# EAGLE board badge_spacehuhn (EAGLE 7.6.0)
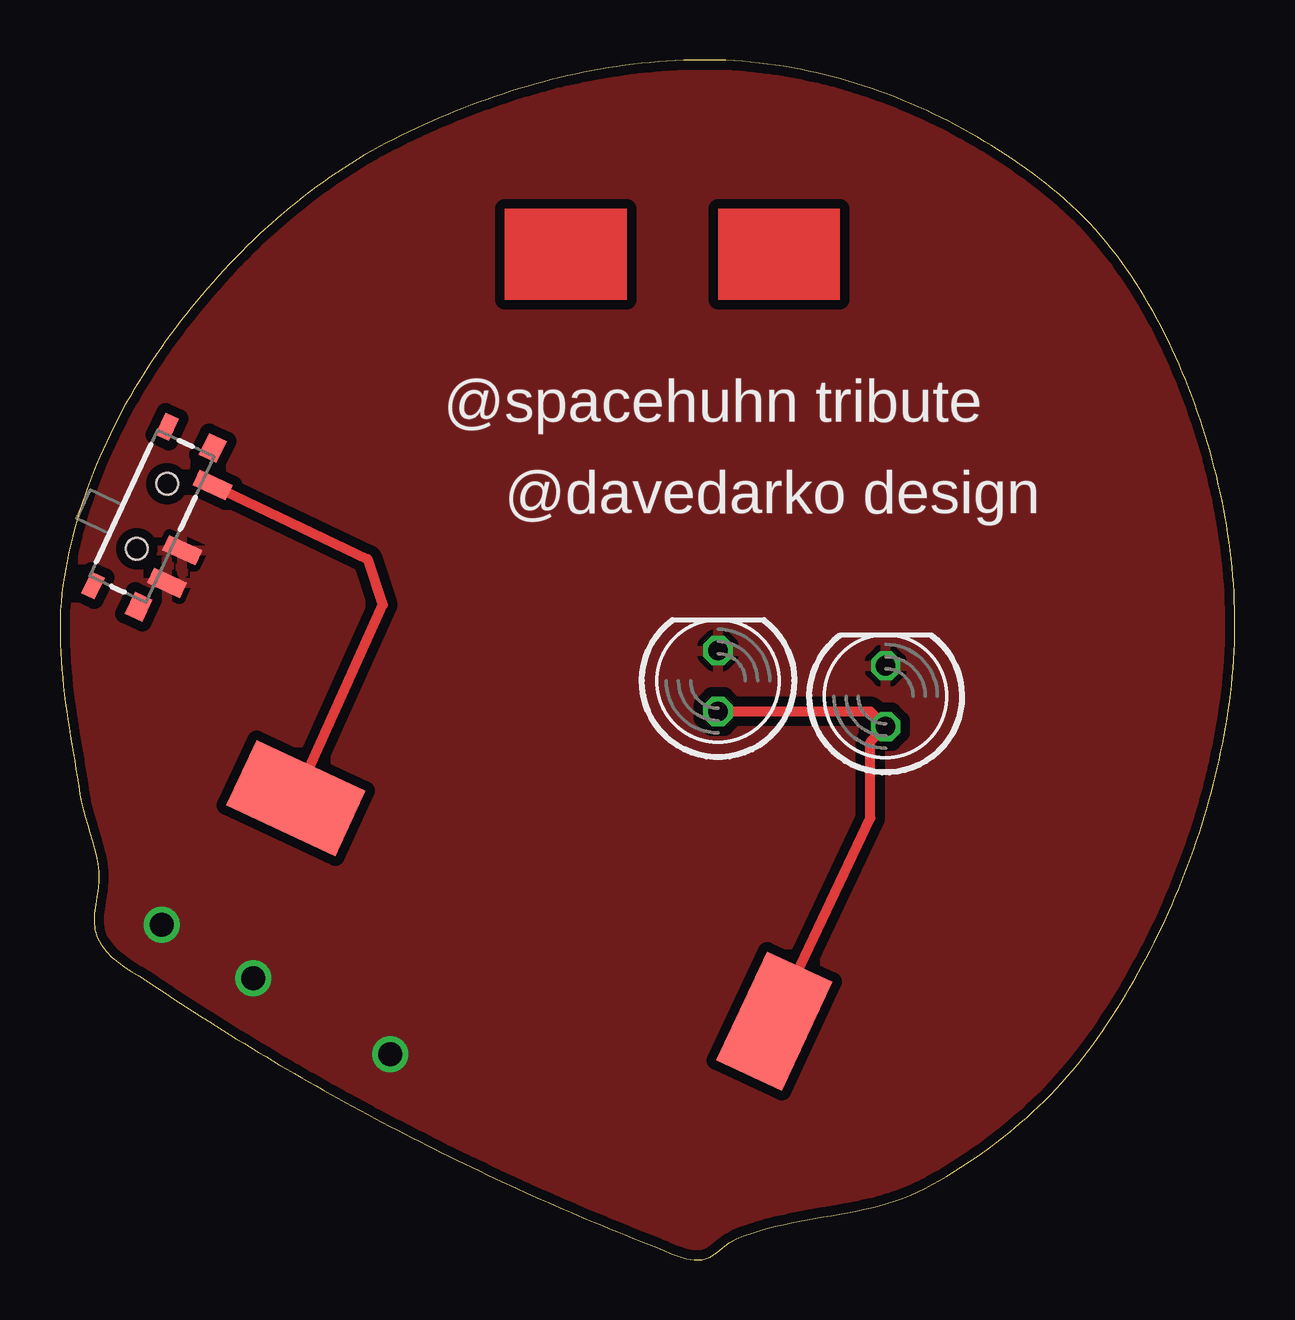
[diagram p0: board, top side]
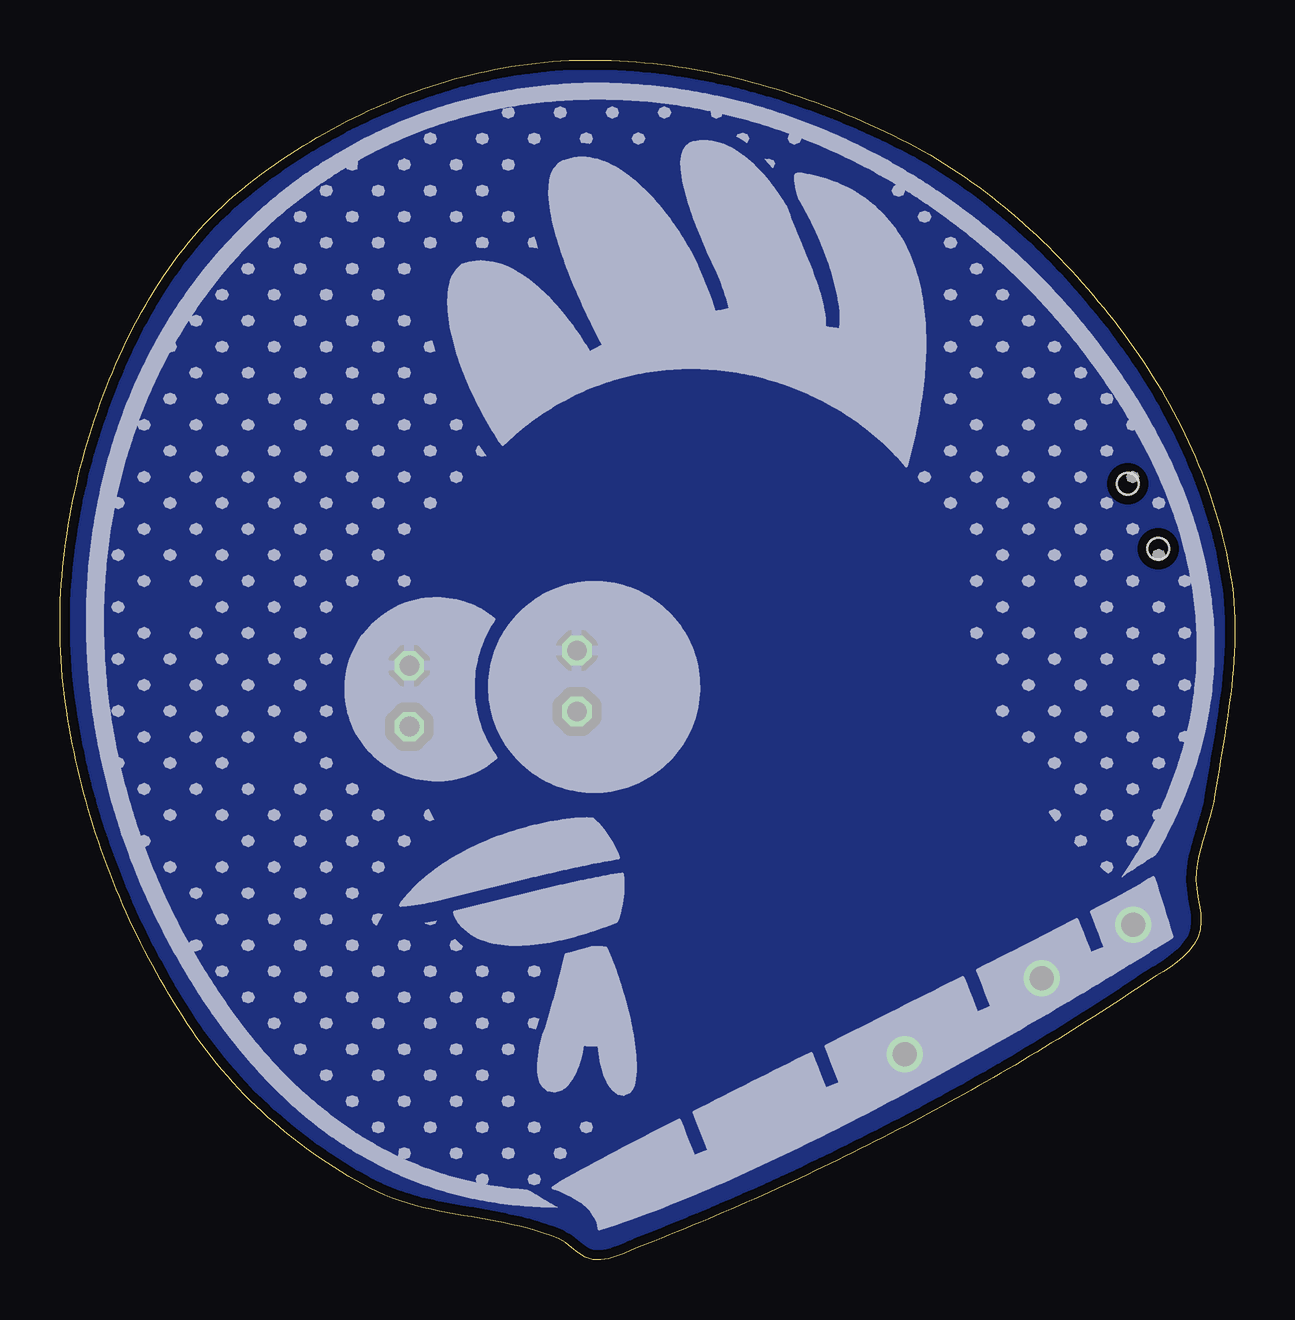
[diagram p1: board, bottom side, seen from below]

Size 48.96 x 50 mm. Coordinates in mm from the lower left corner, seen from the top.
Outline: 28.78,49.9 28.43,49.93 28.09,49.96 27.74,49.98 27.39,49.99 27.04,49.99 26.69,50 26.34,49.99 25.99,49.98 25.64,49.97 25.29,49.95 24.94,49.92 24.59,49.89 24.24,49.86 23.89,49.82 23.55,49.77 23.2,49.72 22.86,49.67 22.51,49.61 22.17,49.54 21.82,49.48 21.48,49.41 21.14,49.33 20.8,49.25 20.46,49.16 20.12,49.08 19.78,48.98 19.45,48.89 19.11,48.79 18.78,48.68 18.44,48.58 18.11,48.46 17.78,48.35 17.45,48.23 17.13,48.11 16.8,47.98 16.47,47.85 16.15,47.72 15.83,47.58 15.51,47.44 15.19,47.3 14.87,47.15 14.55,47.01 14.24,46.85 13.93,46.7 13.61,46.54 13.31,46.38 13,46.21 12.7,46.04 12.41,45.86 12.11,45.68 11.82,45.49 11.53,45.3 11.24,45.11 10.96,44.91 10.68,44.71 10.4,44.5 10.13,44.29 9.86,44.07 9.59,43.86 9.32,43.63 9.06,43.41 8.8,43.18 8.54,42.95 8.29,42.71 8.04,42.47 7.79,42.23 7.54,41.99 7.3,41.74 7.06,41.49 6.83,41.24 6.59,40.98 6.36,40.72 6.13,40.46 5.91,40.2 5.69,39.93 5.47,39.66 5.25,39.39 5.04,39.12 4.83,38.85 4.62,38.57 4.42,38.29 4.21,38.01 4.01,37.72 3.82,37.43 3.63,37.14 3.44,36.85 3.26,36.55 3.08,36.25 2.9,35.95 2.73,35.65 2.56,35.34 2.4,35.03 2.24,34.72 2.09,34.41 1.94,34.09 1.79,33.78 1.65,33.46 1.52,33.13 1.39,32.81 1.26,32.49 1.14,32.16 1.03,31.83 0.92,31.5 0.81,31.17 0.71,30.83 0.62,30.5 0.53,30.16 0.45,29.82 0.37,29.48 0.3,29.14 0.23,28.8 0.17,28.45 0.12,28.11 0.08,27.76 0.04,27.41 0.02,27.06 0.01,26.71 0,26.36 0,26.01 0.01,25.66 0.03,25.31 0.05,24.96 0.07,24.61 0.11,24.26 0.14,23.91 0.18,23.56 0.23,23.22 0.28,22.87 0.33,22.52 0.38,22.18 0.44,21.83 0.49,21.48 0.55,21.14 0.61,20.79 0.66,20.45 0.72,20.1 0.78,19.75 0.83,19.41 0.89,19.08 0.97,18.76 1.05,18.43 1.15,18.11 1.24,17.79 1.34,17.47 1.42,17.15 1.5,16.83 1.57,16.5 1.61,16.17 1.62,15.82 1.59,15.48 1.54,15.14 1.48,14.79 1.44,14.45 1.42,14.1 1.45,13.76 1.55,13.43 1.72,13.13 1.92,12.86 2.17,12.62 2.43,12.4 2.7,12.2 2.99,12.01 3.28,11.83 3.57,11.65 3.85,11.47 4.14,11.27 4.43,11.08 4.72,10.89 5.01,10.7 5.31,10.5 5.6,10.32 5.89,10.13 6.19,9.94 6.48,9.75 6.78,9.57 7.07,9.38 7.37,9.2 7.67,9.02 7.97,8.83 8.27,8.65 8.57,8.47 8.86,8.3 9.16,8.12 9.47,7.94 9.77,7.77 10.07,7.59 10.37,7.42 10.68,7.25 10.98,7.07 11.28,6.9 11.59,6.73 11.9,6.57 12.2,6.4 12.51,6.23 12.82,6.07 13.12,5.9 13.43,5.74 13.74,5.58 14.05,5.41 14.36,5.25 14.67,5.09 14.98,4.94 15.29,4.78 15.6,4.62 15.92,4.47 16.23,4.31 16.54,4.16 16.86,4.01 17.17,3.85 17.49,3.7 17.8,3.55 18.12,3.41 18.43,3.26 18.75,3.11 19.07,2.97 19.39,2.82 19.7,2.68 20.02,2.54 20.34,2.4 20.66,2.25 20.98,2.12 21.3,1.98 21.62,1.84 21.94,1.7 22.27,1.57 22.59,1.43 22.91,1.3 23.23,1.17 23.56,1.04 23.88,0.91 24.21,0.78 24.53,0.65 24.86,0.52 25.16,0.4 25.47,0.27 25.78,0.15 26.1,0.05 26.43,0 26.76,0.01 27.08,0.11 27.36,0.29 27.63,0.5 27.89,0.71 28.18,0.87 28.5,1 28.82,1.11 29.14,1.22 29.47,1.31 29.8,1.4 30.13,1.47 30.47,1.54 30.8,1.61 31.13,1.67 31.47,1.73 31.81,1.79 32.14,1.85 32.48,1.91 32.81,1.97 33.15,2.03 33.48,2.1 33.81,2.18 34.14,2.26 34.47,2.35 34.8,2.45 35.12,2.57 35.43,2.69 35.75,2.83 36.05,2.99 36.35,3.15 36.65,3.32 36.95,3.49 37.24,3.67 37.54,3.85 37.82,4.04 38.11,4.23 38.39,4.43 38.67,4.63 38.95,4.84 39.22,5.05 39.49,5.26 39.76,5.48 40.02,5.7 40.28,5.93 40.53,6.16 40.78,6.4 41.03,6.64 41.27,6.88 41.51,7.13 41.75,7.38 41.98,7.64 42.2,7.9 42.42,8.17 42.64,8.44 42.85,8.71 43.05,8.99 43.25,9.27 43.45,9.56 43.65,9.85 43.84,10.14 44.03,10.44 44.22,10.74 44.4,11.04 44.58,11.34 44.76,11.65 44.93,11.96 45.1,12.27 45.26,12.58 45.43,12.89 45.59,13.2 45.74,13.52 45.9,13.84 46.05,14.16 46.19,14.48 46.33,14.8 46.47,15.12 46.61,15.45 46.74,15.78 46.87,16.1 47,16.43 47.12,16.76 47.24,17.1 47.35,17.43 47.46,17.76 47.57,18.1 47.67,18.44 47.77,18.77 47.87,19.11 47.96,19.45 48.05,19.79 48.14,20.14 48.22,20.48 48.3,20.82 48.37,21.17 48.44,21.51 48.51,21.86 48.57,22.21 48.63,22.55 48.68,22.9 48.73,23.25 48.78,23.6 48.82,23.95 48.85,24.3 48.89,24.65 48.91,25 48.93,25.35 48.94,25.7 48.95,26.05 48.96,26.41 48.95,26.76 48.95,27.11 48.94,27.46 48.92,27.81 48.9,28.16 48.87,28.51 48.84,28.86 48.8,29.21 48.76,29.56 48.72,29.91 48.66,30.25 48.61,30.6 48.55,30.95 48.49,31.29 48.42,31.64 48.35,31.98 48.27,32.32 48.19,32.67 48.1,33.01 48.01,33.35 47.92,33.68 47.82,34.02 47.72,34.36 47.61,34.69 47.5,35.03 47.39,35.36 47.27,35.69 47.15,36.02 47.03,36.35 46.9,36.67 46.76,36.99 46.63,37.32 46.48,37.64 46.34,37.95 46.19,38.27 46.04,38.58 45.88,38.89 45.71,39.2 45.55,39.51 45.37,39.81 45.2,40.12 45.01,40.41 44.83,40.71 44.63,41 44.44,41.29 44.23,41.57 44.02,41.85 43.81,42.13 43.59,42.4 43.37,42.67 43.14,42.93 42.9,43.19 42.66,43.44 42.41,43.69 42.16,43.93 41.9,44.17 41.63,44.39 41.36,44.61 41.09,44.83 40.82,45.04 40.54,45.25 40.27,45.46 39.98,45.66 39.7,45.85 39.41,46.04 39.12,46.23 38.83,46.42 38.53,46.6 38.24,46.77 37.94,46.95 37.63,47.11 37.33,47.28 37.02,47.44 36.71,47.59 36.4,47.75 36.09,47.89 35.77,48.03 35.46,48.17 35.14,48.31 34.82,48.43 34.49,48.56 34.17,48.68 33.84,48.79 33.51,48.9 33.18,49.01 32.85,49.11 32.52,49.21 32.19,49.3 31.85,49.38 31.51,49.46 31.18,49.54 30.84,49.61 30.5,49.67 30.16,49.73 29.81,49.78 29.47,49.83 29.13,49.87 28.78,49.9
Copper layers (1*16): Top 0.0356mm / dielectric 1.5011mm / Bottom 0.0356mm
Design rules "LaenPCBOrder": minimum track width 6mil, minimum drill 13mil, track to track 6mil, track to pad 6mil, pad to pad 6mil, via to via 6mil, smd to smd 6mil, copper to edge 15mil, drill to drill 6mil, minimum pad ring 7mil, minimum via ring 7mil, stop-mask expansion 3mil, vias tented up to drill 0mil, thermal gap 10mil

## Footprints (pad centres in the part's own frame; a part is rotated, then mirrored left to right if it is on the bottom)
LED5MM = drill 0.813 octagon: A -1.27,0; K 1.27,0
SWITCH-SPST-SMD-A = smd 0.7 x 1.5: 1 -2.25,-1.75; 2 -0.75,-1.75; 3 2.25,-1.75 | smd 1 x 0.6: GND1 -3.65,1; GND3 3.65,1 | smd 1 x 0.8: GND2 -3.65,-1.1; GND4 3.65,-1.1 | hole 0.9: -1.5,0; 1.5,0
CR2032SMD = smd 5 x 3: + 0,-11 | smd 3 x 5: - 0,11

## Placement (x,y rotation side)
LED1  [LED5MM]  34.4,23.49 90 top
LED2  [LED5MM]  27.42,24.12 90 top
S1  [SWITCH-SPST-SMD-A]  3.82,30.99 65 top
U$1  CR2032SMD  [CR2032SMD]  19.8,14.6 65 top
U$2  [DAVEDARKO_GOLD]  36.31,9.52 0 top

## Library data of the parts
LED1 LED2 = led
S1 = SparkFun-Electromechanical
U$1 = battery
U$2 = LOGOS

## Nets
GND: LED1.K LED2.K S1.1 S1.2
N$3: S1.3 U$1.-
VCC: LED1.A LED2.A U$1.+

## Tracks (layer width: path | path; a pad name or v marks a point on that pad's centre or on a via)
GND  (via drill 1)
  other vias: 4.24,13.96 8.05,11.74 13.77,8.56
  pour Top (isolate 0.406): 0.75,51.43 50.28,51.43 50.28,-1.91 -0.52,-1.91 -0.52,51.43
  pour Bottom (isolate 0.406): -5.6,52.7 50.28,52.7 50.28,-3.18 -5.6,-3.18
N$3
  Top 0.406: U$1.- 13.45,27.3 12.81,29.2 S1.3
VCC
  Top 0.406: LED2.A 33.77,22.85 LED1.A 33.77,21.58 33.77,18.41 U$1.+
(copper drawn outside any net)
  shapes: Top area x2

## Text on the board
tNames: @spacehuhn tribute | @davedarko design